# Altium PCB PCB.PcbDoc (part 2 of 2)
Units mil, origin at the board's own origin, x right, y up, seen from the top; angles counter-clockwise.
Board outline 3936.02 x 2558.06 mil, 4 copper layers (Top Layer 1, Top Layer, Bottom Layer, Bottom Layer 1), stack 58.4 mil thick; 158 components, 106 nets, 653 pads, 482 vias.
Unrouted connection lines stored in the file: 11.
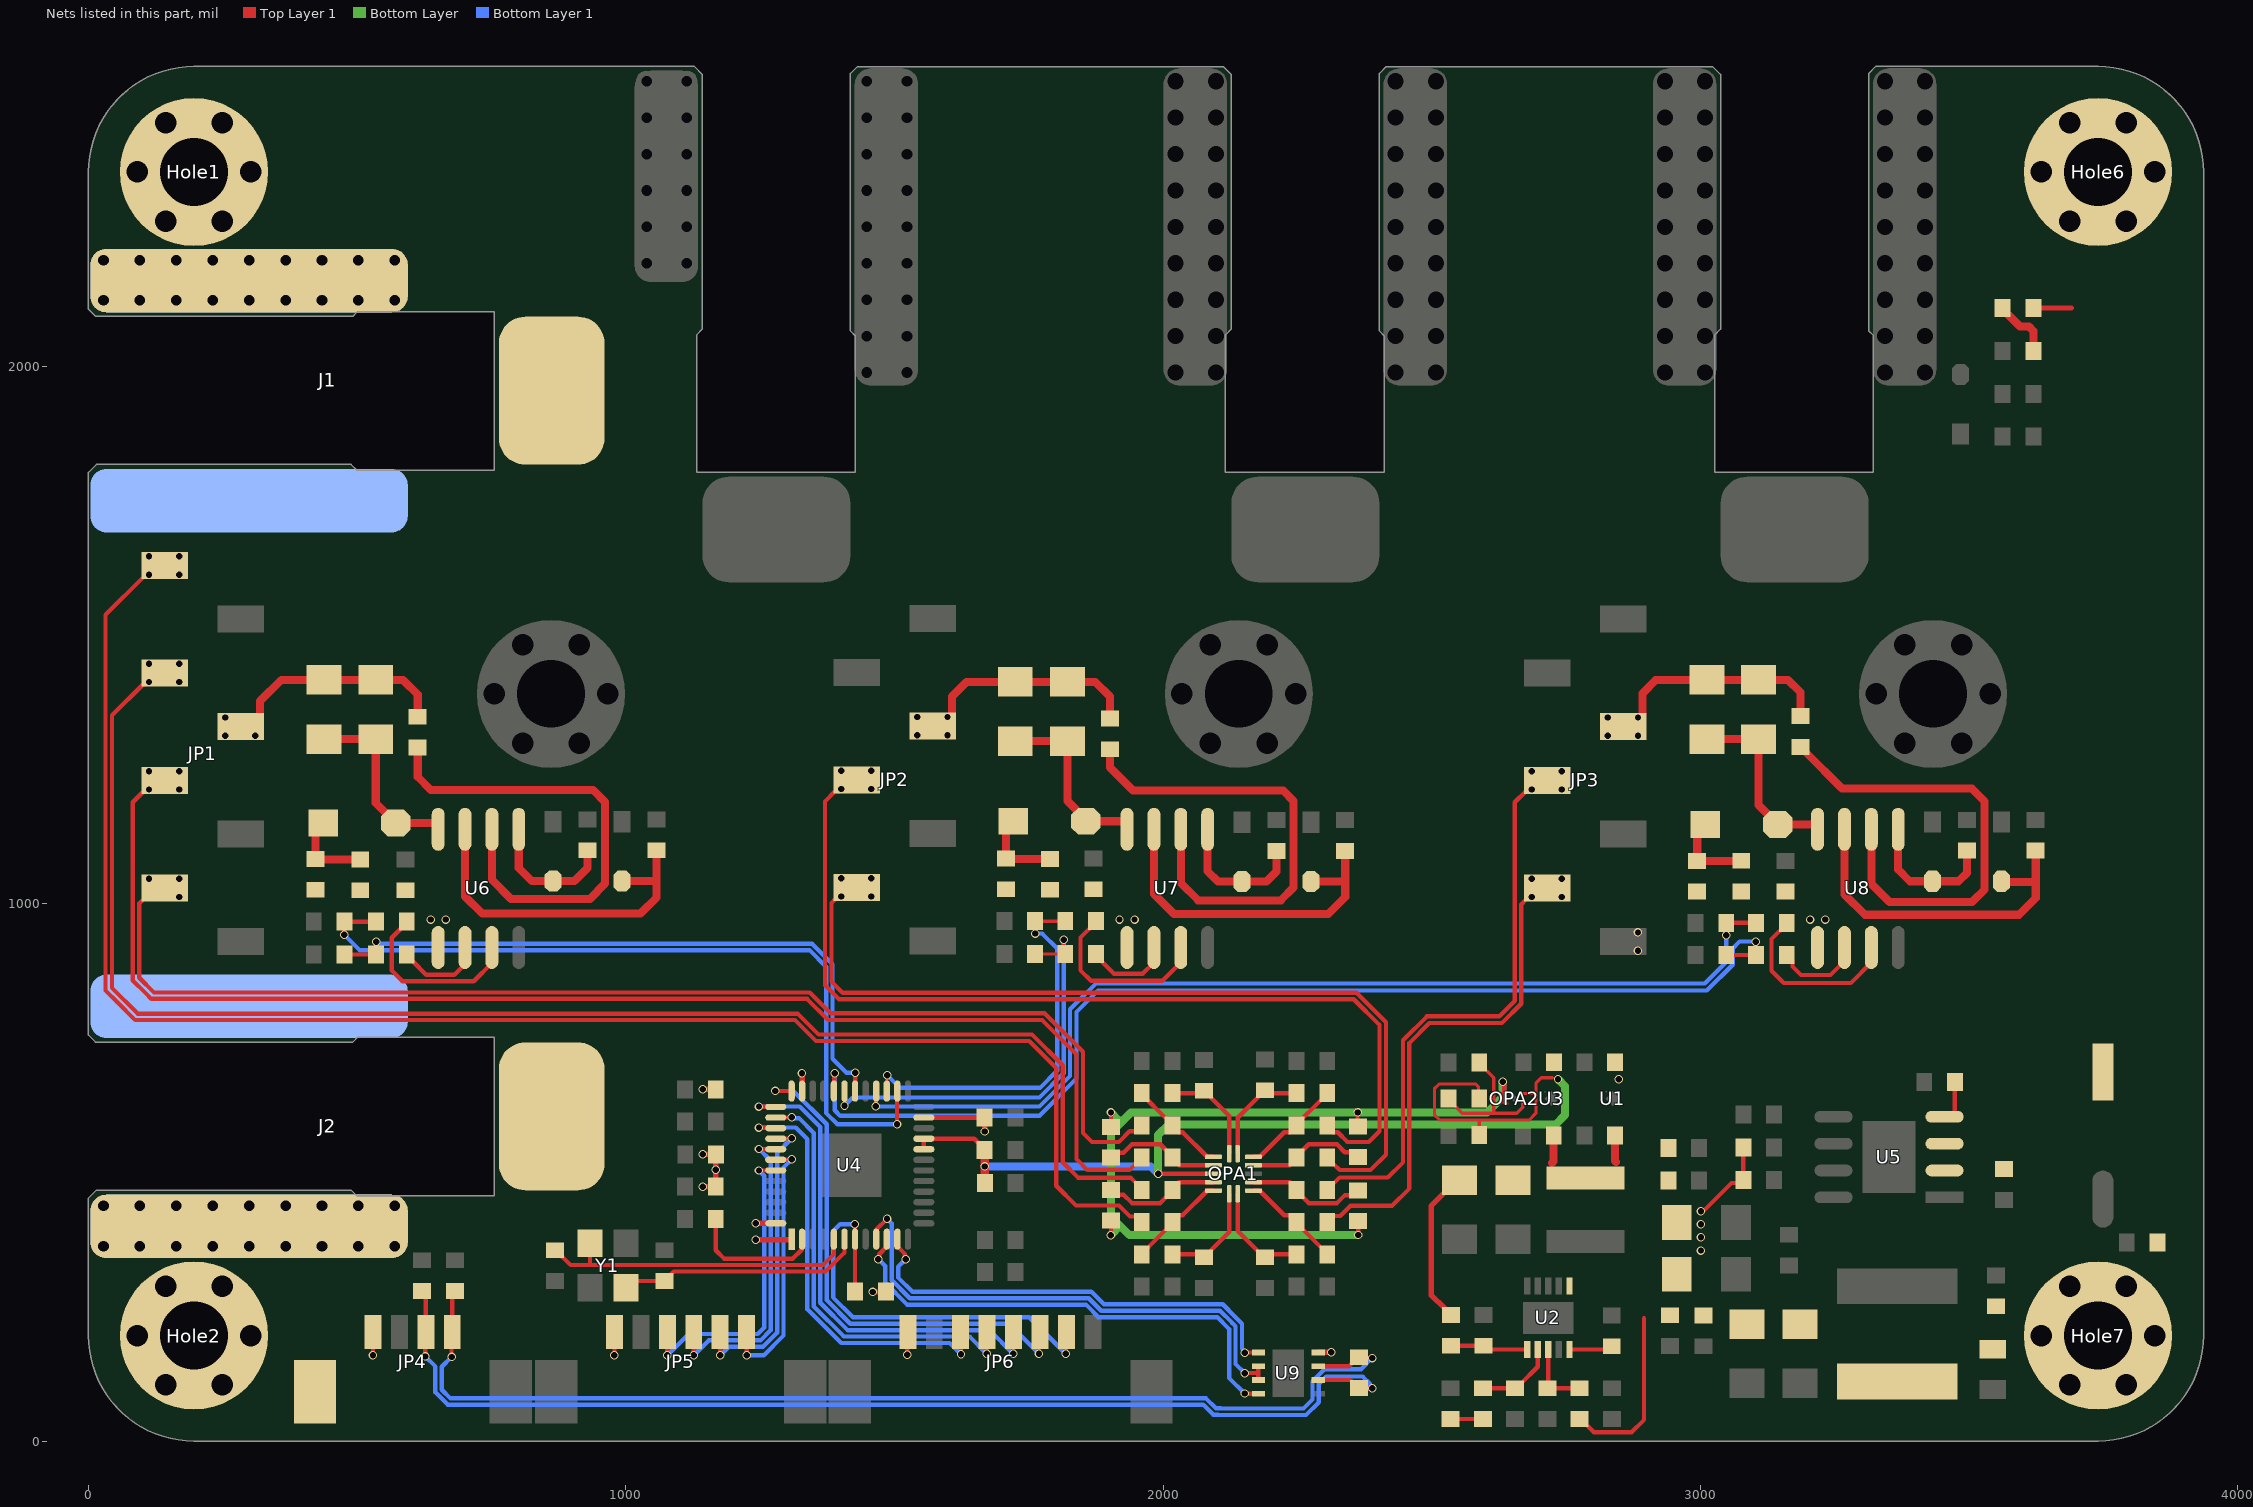
[diagram p4: the nets of this part, all layers, seen from the top]

## Via types
v1: diameter 15.75, hole 11.81, Top Layer 1 to Bottom Layer 1, tented both sides, 362 vias
v2: diameter 39.37, hole 28, Top Layer 1 to Bottom Layer 1, tented both sides, 120 vias

## Nets (pads, with @x,y where several pads share a name; then routed paths per layer and width w, separated by ;. In a path a pad name is that pad's centre, name@x,y a point inside that pad or via, vN(x,y) a via of type N, cw(c..) or ccw(c..) an arc to the next point about the centre after c; other vN are vias at no path point) (continued)
NetC20_2: C20.2 R9.1 U2.7 | length 144.2
  Top Layer 1 w8: R9.1@2595.13,98.75 C20.2@2655.13,98.75 C20.2@2657.09,98.75 ; C20.2@2665,102 2665,106.66 2697.32,138.97 U2.7@2697.32,170.83
NetC21_2: C21.2 R9.2 | length 60
  Top Layer 1 w8: C21.2@2535.13,41.67 R9.2@2595.13,41.67
NetC25_2: C25.2 C27.2 D1.2 U6.8 | length 355.8
  Top Layer 1 w15: C27.2@438.84,1306.88 529,1306.88 C25.2@534.84,1306.88 534.84,1187.7 D1.2@572,1150.54 646.84,1150.54 651,1146.39 U6.8@651,1139
NetC26_2: C26.2 C28.2 D2.2 U7.8 | length 349.4
  Top Layer 1 w15: C26.2@1725,1303 C28.2@1822,1303 1822,1191.32 1856.5,1156.82 D2.2@1856.5,1154 1928.84,1154 1933,1149.84 U7.8@1933,1139
NetC31_2: C31.2 C32.2 D7.2 U8.8 | length 350.7
  Top Layer 1 w15: C32.2@3012,1306.88 C31.2@3108,1306.88 3108,1184.23 3143.59,1148.65 D7.2@3143.59,1148 3213.93,1148 3218.09,1143.84 U8.8@3218.09,1139
NetD1_1: D1.1 R7.2 R15.2 | length 156.2
  Top Layer 1 w15: D1.1@437,1150.54 423,1136.54 R15.2@423,1083.54 423.5,1083.04 505.5,1083.04 R7.2@506,1082.54
NetD2_1: D2.1 R14.2 R16.2 | length 157.5
  Top Layer 1 w15: D2.1@1721.5,1154 1708,1140.5 R16.2@1708,1084.54 1708.5,1084.04 1789.5,1084.04 R14.2@1790,1083.54
NetD3_2: D3.2 R21.1 U6.7 | length 659.5
  Top Layer 1 w15: U6.7@701,1139 701,1014 733,982 1027.27,982 1057,1011.73 1057,1041 ; D3.2@993,1042.76 1055.24,1042.76 1057,1041 ; R21.1@1057,1099.91 1057,1041
NetD4_2: D4.2 R22.1 U7.7 | length 655.1
  Top Layer 1 w15: U7.7@1983,1139 1983,1018.73 2020.47,981.25 2307.46,981.25 2339,1012.79 2339,1042 ; D4.2@2275,1041.76 2338.76,1041.76 2339,1042 ; R22.1@2339,1098.91 2339,1042
NetD5_2: D5.2 R29.1 U6.5 | length 253
  Top Layer 1 w15: U6.5@801,1139 801,1067 825.24,1042.76 D5.2@865,1042.76 904.76,1042.76 929,1067 R29.1@929,1099.91
NetD6_2: D6.2 R30.1 U7.5 | length 260
  Top Layer 1 w15: U7.5@2083,1139 2083,1061 2102.12,1041.88 D6.2@2147,1041.88 2192.29,1041.88 2211,1060.59 R30.1@2211,1098.91
NetD7_1: D7.1 R31.2 R61.2 | length 156
  Top Layer 1 w15: D7.1@3008.59,1148 2994.09,1133.5 R31.2@2994.09,1080.09 2994.32,1080.32 3075.77,1080.32 R61.2@3076,1080.54
NetD8_2: D8.2 R34.1 U8.7 | length 658.4
  Top Layer 1 w15: U8.7@3268.09,1139 3268.09,1017.91 3306,980 3593,980 3624,1011 3624,1041 ; D8.2@3560,1042.2 3561.2,1041 3624,1041 ; R34.1@3624,1099.35 3624,1041
NetD9_2: D9.2 R38.1 U8.5 | length 259.9
  Top Layer 1 w15: U8.5@3368.09,1139 3368.09,1063.91 3389.68,1042.32 3480.51,1042.32 3496,1057.82 R38.1@3496,1099.35
NetOPA1_1: OPA1.1 R42.1 R43.1 | length 185.9
  Top Layer 1 w8: R43.1@1960.46,648 1960.46,646.03 2005.76,600.73 2006.78,600.73 2017.54,589.97 R42.1@2017.54,588 2017.54,586.03 2028.31,575.27 2036.41,575.27 2082.18,529.5 OPA1.1@2093.8,529.5
NetOPA1_2: OPA1.2 R39.1 R40.1 | length 219.5
  Top Layer 1 w8: R39.1@1903,528 1911.96,536.96 1926.51,536.96 1942.28,552.73 1994.78,552.73 2017.54,529.97 R40.1@2017.54,528 2017.54,526.03 2029.83,513.75 OPA1.2@2093.8,513.75
NetOPA1_4: OPA1.4 R44.1 R45.1 | length 219.5
  Top Layer 1 w8: R44.1@1903,468 1911.96,459.04 1926.51,459.04 1942.29,443.27 1994.78,443.27 2017.54,466.03 R45.1@2017.54,468 2017.54,469.97 2029.83,482.25 OPA1.4@2093.8,482.25
NetOPA1_5: OPA1.5 R47.1 R48.1 | length 185.9
  Top Layer 1 w8: R48.1@1960.46,348 1960.46,349.97 1971.22,360.73 1972.24,360.73 2017.54,406.03 R47.1@2017.54,408 2017.54,409.97 2028.31,420.73 2036.41,420.73 2082.18,466.5 OPA1.5@2093.8,466.5
NetOPA1_6: OPA1.6 R46.2 R48.2 | length 199.6
  Top Layer 1 w8: R48.2@2017.54,348 2072.51,348 2077.97,342.54 2088.73,353.31 2088.73,355.28 2123.13,389.67 OPA1.6@2123.13,460.8
NetOPA1_7: OPA1.7 R51.2 R53.2 | length 201.3
  Top Layer 1 w8: OPA1.7@2138.87,460.8 2138.87,391.7 2188.03,342.54 2193.49,348 R53.2@2248.46,348
NetOPA1_8: OPA1.8 R52.1 R53.1 | length 189.9
  Top Layer 1 w8: OPA1.8@2168.2,466.5 2179.82,466.5 2225.59,420.73 2237.69,420.73 2248.46,409.97 R52.1@2248.46,408 2248.46,406.03 2293.76,360.73 2294.78,360.73 2305.54,349.97 R53.1@2305.54,348
NetOPA1_9: OPA1.9 R49.1 R50.1 | length 223.1
  Top Layer 1 w8: OPA1.9@2168.2,482.25 2236.17,482.25 2248.46,469.97 R50.1@2248.46,468 2248.46,466.03 2271.22,443.27 2323.62,443.27 2338.5,458.15 2354.15,458.15 R49.1@2363,467
NetOPA1_11: OPA1.11 R54.1 R55.1 | length 223.1
  Top Layer 1 w8: OPA1.11@2168.2,513.75 2236.17,513.75 2248.46,526.03 2248.46,529.97 2271.22,552.73 2323.62,552.73 2338.22,538.14 2353.86,538.14 R54.1@2363,529
NetOPA1_12: OPA1.12 R57.1 R58.1 | length 189.9
  Top Layer 1 w8: OPA1.12@2168.2,529.5 2179.82,529.5 2225.59,575.27 2237.69,575.27 2248.46,586.03 R57.1@2248.46,588 2248.46,589.97 2293.76,635.27 2294.78,635.27 2305.54,646.03 R58.1@2305.54,648
NetOPA1_13: OPA1.13 R56.2 R58.2 | length 201.3
  Top Layer 1 w8: OPA1.13@2138.87,535.2 2138.87,602.33 2177.27,640.72 2177.27,642.69 2188.03,653.46 R56.2@2190,653.46 2195.46,648 R58.2@2248.46,648
NetOPA1_14: OPA1.14 R41.2 R43.2 | length 198.2
  Top Layer 1 w8: R43.2@2017.54,648 2071.54,648 R41.2@2076,652.46 2077.97,652.46 2088.73,641.69 2088.73,639.72 2123.13,605.33 OPA1.14@2123.13,535.2
NetOPA2_4: OPA2.4 R59.2 R60.1 | length 267.6
  Top Layer 1 w6: R59.2@2531.46,638 2531.46,636.03 2556.97,610.51 2607.69,610.51 2610.31,610.51 2615.23,610.51 ; R60.1@2588.54,705 2588.54,703.03 2615.23,676.35 2615.23,610.51 ; OPA2.4@2669.36,628.55 2669.35,621.46 2658.41,610.51 2615.23,610.51
NetR2_1: R2.1 U5.4 | length 80.5
  Top Layer 1 w8: U5.4@3454.35,604 3467.24,604 3473.54,610.31 R2.1@3473.54,669
NetR3_2: R3.2 R4.1 | length 113.7
  Top Layer 1 w15: R3.2@3562.46,2109 3562.46,2107.03 3594.74,2074.74 3611.21,2074.74 3620,2065.96 3620,2029.46 R4.1@3619.54,2029
NetR8_2: R8.2 R11.1 U2.8 | length 131
  Top Layer 1 w8: U2.8@2716.99,169 2716.99,100.62 R11.1@2715.13,98.75 R8.2@2775.13,98.75
NetR12_1: R12.1 U2.10 | length 81.2
  Top Layer 1 w8: U2.10@2756.36,170.83 2828.83,170.83 R12.1@2835,177
NetR19_2: R19.2 U6.2 | length 164.5
  Top Layer 1 w8: R19.2@592.54,906 592.54,904.03 603.31,893.27 603.59,893.27 628.75,868.11 681.11,868.11 701,888 U6.2@701,919
NetR20_2: R20.2 U7.2 | length 161.8
  Top Layer 1 w8: R20.2@1875.09,907 1885.85,896.24 1885.85,893.01 1908.86,870 1962,870 1983,891 U7.2@1983,919
NetR23_1: R23.1 U6.6 | length 906.2
  Top Layer 1 w15: R23.1@613,1291.46 613,1236.65 637.34,1212.31 939.51,1212.31 961.8,1190.01 961.8,1037.93 933.45,1009.58 786.42,1009.58 751,1045 U6.6@751,1139
NetR24_1: R24.1 U7.6 | length 895.8
  Top Layer 1 w15: R24.1@1901,1288 1901,1254 1944.12,1210.88 2223.63,1210.88 2243,1191.5 2243,1030.7 2219.12,1006.82 2065.42,1006.82 2033,1039.24 U7.6@2033,1139
NetR25_2: R25.2 U6.3 | length 340.3
  Top Layer 1 w8: R25.2@592.54,967 592.54,965.03 564.51,937 564.51,876.05 584.45,856.11 717.11,856.11 751,890 U6.3@751,919
NetR26_2: R26.2 U7.3 | length 340
  Top Layer 1 w8: R26.2@1875.09,968 1875.09,966.03 1846.54,937.49 1846.54,876.46 1866,857 1999,857 2033,891 U7.3@2033,919
NetR33_2: R33.2 U8.2 | length 164.7
  Top Layer 1 w8: R33.2@3160.63,905 3171.39,894.24 3171.39,883.61 3187,868 3242,868 3268.09,894.09 U8.2@3268.09,919
NetR35_1: R35.1 U8.6 | length 886.8
  Top Layer 1 w15: R35.1@3186,1292.46 3187.97,1292.46 3195.23,1285.19 3195.23,1283.22 3263.46,1215 3505,1215 3529,1191 3529,1027 3505.39,1003.39 3351.61,1003.39 3318.09,1036.91 U8.6@3318.09,1139
NetR36_2: R36.2 U8.3 | length 311.4
  Top Layer 1 w8: R36.2@3160.63,965 3160.63,963.03 3132.4,934.8 3132.4,875.6 3155,853 3280,853 3317,890 U8.3@3318,890
NRST: JP6.7 R64.2 U4.7 | length 811.5
  Top Layer 1 w8: v1(1426.24,404.18) 1426.54,403.87 1426.54,376.51 U4.7@1426.84,376.2 1426.84,282.16 R64.2@1429,280 ; v1(1819,163) 1819,202.09 JP6.7@1820.28,203.37
  Bottom Layer 1 w8: v1(1426.24,404.18) 1399.18,404.18 1386,391 1386,267.91 1422.91,231 1751,231 v1(1819,163)
PGND: Hole2.1 J2.1 JP4.0@421.64,92.72
RS485_A: C40.2 JP4.3 R62.1 U9.6 | length 2125.1
  Top Layer 1 w8: C40.2@621,280 628.06,272.94 JP4.3@628.06,203.37 627,202.31 v1(627,158) ; U9.6@2288.61,114.2 2348.29,114.2 R62.1@2362,100.49 ; R62.1@2365,99.46 2365.46,99 v1(2389,99)
  Bottom Layer 1 w8: v1(627,158) 627,157.89 645.85,139.05 645.85,91.19 669.04,68 2075.03,68 2093.37,49.66 2102.34,49.66 2102.98,49.02 2266.15,49.02 2289.97,72.84 2289.97,107.02 2303.74,120.8 2371.36,120.8 2385.13,107.03 2385.13,104.97 2389,101.1 v1(2389,99)
RS485_B: C39.1 JP4.4 R62.2 U9.7 | length 2103.6
  Top Layer 1 w8: v1(676,157) 676,202.09 JP4.4@677.28,203.37 677.28,275.28 C39.1@682,280 ; U9.7@2288.61,139.8 2346.29,139.8 2358.49,152 R62.2@2364,152 ; R62.2@2365,156.54 2366.54,155 v1(2389,155)
  Bottom Layer 1 w8: v1(676,157) 676,156.89 657.85,138.74 657.85,96.16 674.01,80 2080,80 2098.34,61.66 2107.31,61.66 2107.95,61.02 2261.18,61.02 2277.97,77.81 2277.97,111.99 2300.2,134.23 2368.23,134.23 v1(2389,155)
Shunt_BusH: JP1.6 R45.2 | length 2780.5
  Top Layer 1 w8: v1(112.88,1413) 108.88,1409 102.03,1409 44.1,1351.06 44.1,843.9 92,796 1320,796 1359.01,756.99 1756.01,756.99 1813.25,699.75 1813.25,519.4 1841.89,490.76 1939.66,490.76 1960.46,469.97 R45.2@1960.46,468
  other v1: 169,1413 112.88,1447 168.99,1447
Shunt_BusL: JP1.8 R47.2 | length 3082.4
  Top Layer 1 w8: JP1.8@142,1630 124,1630 109.94,1615.94 109.64,1615.94 102.69,1609 102.69,1608.69 32.1,1538.1 32.1,838.93 54.03,817 87.03,784 1315.03,784 1354.04,744.99 1751.04,744.99 1801.25,694.78 1801.25,684.78 ; 1801.25,684.66 1801.25,475.67 1838.03,438.9 1918.06,438.9 1938.47,418.48 1949.97,418.48 R47.2@1960.46,408
  other v1: 112.88,1613 169,1613 112.88,1647 168.99,1647
Shunt_UH: JP1.4 R40.2 | length 2520.2
  Top Layer 1 w8: v1(112.88,1213) 108.88,1209 102.33,1209 82.6,1189.27 82.6,857.86 107.14,833.32 117.05,823.4 1337.63,823.4 1377.03,784 1775,784 1839,720 1839,525.16 1858.92,505.24 1937.69,505.24 1947.72,515.27 1949.69,515.27 1960.46,526.03 R40.2@1960.46,528
  other v1: 169,1213 112.88,1247 168.99,1247
Shunt_UL: JP1.2 R42.2 | length 2293.6
  Top Layer 1 w8: JP1.2@142,1030 123.69,1030 94.6,1000.9 94.6,862.83 122.02,835.4 1342.6,835.4 1381.39,796.61 1779.36,796.61 1851,724.97 1851,573.69 1867.69,557 1917.72,557 1937.75,577.02 1949.69,577.02 1960.46,587.79 R42.2@1960.46,589.97
  other v1: 169,1013 112.88,1047 168.99,1047
Shunt_VH: JP2.2 R55.2 | length 1611.1
  Top Layer 1 w8: v1(1400.88,1014) 1394.7,1014 1390.69,1010 1390.69,1009.86 1382.81,1001.98 1382.81,855.61 1403.66,834.77 2360,834.77 2414.7,780.04 2414.7,533.41 2386.08,504.8 2328.75,504.8 2318.28,515.27 2316.31,515.27 2305.54,526.03 R55.2@2305.54,528
  other v1: 1457,1014 1400.88,1048 1456.99,1048
Shunt_VL: JP2.4 R57.2 | length 1761.3
  Top Layer 1 w8: v1(1400.88,1214) 1396.88,1210 1390.08,1210 1370.81,1190.73 1370.81,848.82 1396.86,822.77 2355,822.77 2402.7,775.07 2402.7,577.14 2382.76,557.2 2343,557.2 2324.93,575.27 2316.31,575.27 2305.54,586.03 R57.2@2305.54,588
  other v1: 1457,1214 1400.88,1248 1456.99,1248
Shunt_WH: JP3.4 R50.2 | length 1039.6
  Top Layer 1 w8: R50.2@2305.54,468 2305.54,469.97 2316.31,480.73 2318.28,480.73 2328.54,491 2418.27,491 2446.38,519.12 2446.38,746.26 2490.93,790.8 2625.61,790.8 2654.44,819.64 2654.44,1189.24 2674.21,1209 2681.88,1209 v1(2685.88,1213)
  other v1: 2742,1213 2685.88,1247 2741.99,1247
Shunt_WL: JP3.2 R52.2 | length 898.5
  Top Layer 1 w8: R52.2@2305.54,408 2305.54,408.71 2316.31,419.47 2329.75,419.47 2348.81,438.53 2426.13,438.53 2458.38,470.78 2458.38,741.29 2495.47,778.38 2630.58,778.38 2666.44,814.24 2666.44,999.12 2675.69,1008.37 2675.69,1009 2679.7,1013 v1(2685.88,1013)
  other v1: 2742,1013 2685.88,1047 2741.99,1047
SPI3_CS: JP5.3 U4.43 | length 572.6
  Top Layer 1 w8: v1(1077.43,160.06) JP5.3@1077.43,203.37 JP5.3@1077.49,203.43 ; v1(1248,504) 1248.08,504.08 1279.13,504.08 U4.43@1279.2,504.16
  Bottom Layer 1 w8: v1(1077.43,160.06) 1117.27,199.9 1245.74,199.9 1257.78,211.94 1257.78,494.22 v1(1248,504)
SPI3_MISO: JP5.4 U4.41 | length 583.4
  Top Layer 1 w8: v1(1126.64,160.06) JP5.4@1126.64,203.37 JP5.4@1126.7,203.43 ; v1(1248,544) 1248.24,543.76 1278.97,543.76 U4.41@1279.2,543.53
  Bottom Layer 1 w8: v1(1126.64,160.06) 1154.48,187.91 1250.71,187.91 1269.78,206.97 1269.78,522.22 v1(1248,544)
SPI3_MOSI: JP5.6 U4.42 | length 492.1
  Top Layer 1 w8: v1(1225,160) 1225,203.31 JP5.6@1225.06,203.37 ; U4.42@1279.2,523.84 1279.78,524.42 1308.42,524.42 v1(1309,525)
  Bottom Layer 1 w8: v1(1225,160) 1256.75,160 1293.78,197.03 1293.78,509.78 v1(1309,525)
SPI3_SCK: JP5.5 U4.40 | length 570.1
  Top Layer 1 w8: v1(1175.85,160.06) JP5.5@1175.85,203.37 JP5.5@1175.85,203.37 ; U4.40@1279.2,563.21 1279.6,563.61 1308.61,563.61 v1(1309,564)
  Bottom Layer 1 w8: v1(1175.85,160.06) 1191.69,175.91 1255.68,175.91 1281.78,202 1281.78,536.78 v1(1309,564)
SumGND: C41.2 C42.2 Hole7.1 LB1.1
SWCLK: JP6.5 U4.37 | length 927.3
  Top Layer 1 w8: v1(1248,623) 1248.37,622.63 1278.84,622.63 U4.37@1279.2,622.27 ; v1(1721,163) 1721,202.52 JP6.5@1721.85,203.37
  Bottom Layer 1 w8: v1(1248,623) 1324,623 1362,585 1362,257.97 1412.97,207 1677,207 v1(1721,163)
SWDIO: JP6.6 U4.36 | length 957.2
  Top Layer 1 w8: v1(1278,652) 1308.53,652 U4.36@1308.73,651.8 ; v1(1769,163) 1769,201.31 JP6.6@1771.06,203.37
  Bottom Layer 1 w8: v1(1278,652) 1311.97,652 1374,589.97 1374,262.94 1417.94,219 1713,219 v1(1769,163)
TIM1_BKIN: R65.2 U4.2 | length 251.8
  Top Layer 1 w8: R65.2@1167.54,414 1167.54,355.46 1183,340 1311,340 1327.69,356.69 1327.69,375.48 U4.2@1328.42,376.2
TIM1_CH1: R17.1 R19.1 U4.30 | length 1212.6
  Top Layer 1 w8: R17.1@476.54,906 R19.1@535.46,906 536,906.54 v1(536,930) ; U4.30@1426.84,651.8 1426.92,651.87 1426.92,685.92 v1(1427,686)
  Bottom Layer 1 w8: v1(536,930) 538.1,930 542,926.09 1346.91,926.09 1385,888 1385,712 1411,686 v1(1427,686)
TIM1_CH1N: R25.1 R27.2 U4.26 | length 1479.6
  Top Layer 1 w8: v1(476,943) 476,966.46 R27.2@476.54,967 R25.1@535.46,967 ; v1(1505,590.09) 1505,651.21 U4.26@1505.58,651.8
  Bottom Layer 1 w8: v1(476,943) 504.91,914.09 1341.94,914.09 1373,883.03 1373,611 1393.91,590.09 v1(1505,590.09)
TIM1_CH2: R18.1 R20.1 U4.31 | length 792
  Top Layer 1 w6: v1(1407.16,624.68) U4.31@1407.16,651.8 ; R18.1@1762,907 R20.1@1818,907 1815,910 v1(1815,933.39)
  Bottom Layer 1 w8: v1(1407.16,624.68) 1422.48,640 1770,640 1815,685 v1(1815,933.39)
TIM1_CH2N: R26.1 R28.2 U4.27 | length 727.2
  Top Layer 1 w6: U4.27@1485.9,651.8 1486.45,652.35 1486.45,680.45 v1(1487,681) ; v1(1762,945) R28.2@1762,968 R26.1@1818,968
  Bottom Layer 1 w8: v1(1487,681) 1510.2,657.8 1770.83,657.8 1803,689.97 1803,917 1775,945 v1(1762,945)
TIM1_CH3: R32.1 R33.1 U4.32 | length 2126
  Top Layer 1 w8: U4.32@1387.47,651.8 1388.2,652.52 1388.2,684.2 v1(1389,685) ; R32.1@3048.09,905 R33.1@3103.54,905 3103,905.54 v1(3103,930)
  Bottom Layer 1 w8: v1(1389,685) 1389,616 1399,606 1769.94,606 1839,675.06 1839,799.03 1878.96,838.99 3011.96,838.99 3060,887.03 3060,917 3073,930 v1(3103,930)
TIM1_CH3N: R36.1 R37.2 U4.28 | length 1924.2
  Top Layer 1 w8: v1(1465.19,623.27) 1465.7,623.79 1465.7,651.28 U4.28@1466.21,651.8 ; v1(3048,942) 3048,964.91 R37.2@3048.09,965 R36.1@3103.54,965
  Bottom Layer 1 w8: v1(1465.19,623.27) 1770.24,623.27 1827,680.03 1827,804 1875,852 3008,852 3048,892 v1(3048,942)
UART4_RX: JP6.3 U4.39 | length 809.4
  Top Layer 1 w8: v1(1248,584) 1248.55,583.45 1278.65,583.45 U4.39@1279.2,582.9 ; JP6.3@1623.43,203.37 1624,202.8 v1(1624,162)
  Bottom Layer 1 w8: v1(1248,584) 1316.37,584 1338,562.37 1338,246 1401,183 1603,183 v1(1624,162)
UART4_TX: JP6.4 U4.38 | length 805.1
  Top Layer 1 w8: U4.38@1279.2,602.58 1279.41,602.79 1308.79,602.79 v1(1309,603) ; v1(1672,163) 1672,202.73 JP6.4@1672.64,203.37
  Bottom Layer 1 w8: v1(1309,603) 1310.48,601.52 1322.45,601.52 1350,573.97 1350,250.97 1405.97,195 1640,195 v1(1672,163)
USART2_DE: U4.9 U9.2 U9.3 | length 985.9
  Top Layer 1 w8: U4.9@1466.21,376.2 1466.94,376.93 1466.94,394.56 v1(1486.32,413.94) ; v1(2152,127) 2176.39,127 2177.39,128 ; U9.3@2175,115 2176.68,115 2177.39,115.71 2177.39,128 ; U9.2@2177.39,139.8 2177.39,128
  Bottom Layer 1 w8: v1(1486.32,413.94) 1495,405.27 1495,299.97 1528.61,266.36 1861.64,266.36 1885,243 2106.03,243 2129.03,220 2135,214.03 2135,144 v1(2152,127)
USART2_RX: U4.11 U9.1 | length 840.7
  Top Layer 1 w8: U4.11@1505.58,376.2 1505.58,362.43 1519.52,348.49 1519.52,340.48 v1(1521,339) ; v1(2152,165) 2152.19,165.19 2177.2,165.19 U9.1@2177.39,165.38
  Bottom Layer 1 w8: v1(1521,339) 1507,325 1507,304.94 1533.58,278.36 1866.61,278.36 1889.97,255 2111,255 2134,232 2147,219 2147,172.1 2152,167.1 v1(2152,165)
USART2_TX: U4.10 U9.4 | length 926.2
  Top Layer 1 w8: v1(1470.21,338.98) 1471.69,340.47 1471.69,348.22 1485.9,362.43 U4.10@1485.9,376.2 ; v1(2152,89) 2152.19,88.81 2177.2,88.81 U9.4@2177.39,88.62
  Bottom Layer 1 w8: v1(1470.21,338.98) 1483,326.2 1483,295 1523.64,254.36 1856.67,254.36 1880.03,231 2101.06,231 2123,209.06 2123,118 v1(2152,89)
VBUS: C2.2 E1.1 Hole1.1 Hole6.1 J1.1 R3.1 U5.2 U5.3 | length 70.5
  Top Layer 1 w10: R3.1@3619.54,2109 3690,2109
VCC3.3V: C8.1 C43.2 C44.2 C45.2 C46.2 JP4.1 JP5.1 JP6.1 R64.1 U1.1 U4.1 U4.23 U4.35 U4.48 U9.8 | length 602.7
  Top Layer 1 w8: v1(529.64,160.06) JP4.1@529.64,203.37 JP4.1@529.7,203.43 ; v1(979,160.06) JP5.1@979,203.37 JP5.1@979.06,203.43 ; v1(1524,161) 1524,202.37 JP6.1@1525,203.37
  Top Layer 1 w10: v1(1143.09,474) C44.2@1167.54,474 ; v1(1143.09,655) C45.2@1167.54,655 ; v1(1143.55,534) C43.2@1168,534 1167.5,533.5 v1(1167.5,505.5) C44.2@1167.54,474 ; v1(1241.87,375) 1307.83,375 1308.73,375.91 U4.1@1308.73,376.2 ; v1(1241.87,406) 1242,405.87 1279.07,405.87 U4.48@1279.2,405.73 ; v1(1328,685) 1328.21,684.79 1328.21,652 U4.35@1328.42,651.8 ; v1(1459.64,278) 1483.09,278 R64.1@1484.09,279 ; U4.23@1554.8,602.58 1667.58,602.58 C46.2@1668,603 v1(1668,576.61) ; U9.8@2288.61,165.38 2288.92,165.69 v1(2312.69,165.69) ; C8.1@2841.09,705.47 C8.1@2849.8,696.76
  other v1: 2848,674
VCC5V: C9.2 C15.2 C16.2 C17.2 C18.2 C22.2 L2.2 R10.1 U1.3 U1.4 U3.3 U3.4 | length 389.3
  Top Layer 1 w10: R10.1@2536,235.09 2534.03,235.09 2524.27,244.85 2524.27,246.82 2499,272.09 2499,437.92 2547.08,486 C16.2@2552,486 ; C22.2@2727.09,569.47 C22.2@2736,560.56
  Top Layer 1 w15: 2724,518 2727,521 2727,551 ; C9.2@2841.09,569.47 2841.09,521.91 2843,520
VCC12V: C3.2 C4.2 C5.2 C6.2 C7.2 C11.2 C12.2 C29.2 C30.2 C33.2 L1.2 R1.1 R7.1 R8.1 R14.1 R15.1 R16.1 R31.1 R61.1 U2.1 U6.1 U7.1 U8.1 | length 492.6
  Top Layer 1 w8: R8.1@2775.13,41.67 2777.09,41.67 2801.76,17 2872,17 2895,40 2895,229 ; v1(3001,428) 3002.48,429.48 3006.64,429.48 3057.84,480.68 3074.6,480.68 C7.2@3079.91,486 3079.91,506.24 R1.1@3079.91,547
  other v1: 3001,355 3001,380 3001,404 2883.74,913 2883.73,947 636.91,971 664.91,971 1918.91,971 1946.91,971 3204,971 3232,971
VCCA1.65V: OPA2.1 OPA2.2 R39.2 R44.2 R49.2 R54.2 | length 1610.5
  Top Layer 1 w8: v1(1902.98,383.8) R44.2@1903,410.91 ; R39.2@1903,585.09 v1(1903,612) ; v1(2362,612) 2362,587.09 R54.2@2363,586.09 ; v1(2363,384) R49.2@2363,409.91 ; v1@2632,666.9 v1@2632,667.95 ; v1(2632,669) v1@2632,667.95 ; OPA2.2@2638.65,628.55 2635.06,632.13 2635.06,664.89 v1@2632,667.95
  Bottom Layer w15: v1(1903,612) 1917.5,597.5 ; v1@1903.32,383.81 1919.93,401.07 ; v1(2363,384) 2362.86,383.86 2360.65,383.86 2360.6,383.8 1937.2,383.8 1919.93,401.07 ; v1(2632,669) 2631.86,668.86 2631.86,640.66 2603.2,612 v1(2362,612) 1940.35,612 1903,574.65 1903,418 1919.93,401.07
VCCA3.3V: C19.1 C38.2 C47.2 C48.2 OPA1.3 OPA2.5 R59.1 U3.1 U4.20 U4.21 | length 2050.7
  Top Layer 1 w6: C38.2@2588.54,570 2588.54,598 ; R59.1@2588.54,638 2586.78,639.76 2586.78,660.22 2582,665 2514,665 2505,656 2505,608 2514.95,598.05 2681.65,598.05 2693.79,610.19 2693.79,647.45 ; OPA2.5@2669.35,647.45 2693.79,647.45 ; 2724.93,676.49 2704.15,676.49 2693.79,666.12 2693.79,647.45
  Top Layer 1 w8: U4.20@1554.8,543.53 U4.20@1554.8,546 ; U4.20@1555,546 1554.8,546.2 U4.21@1554.8,563.21 1648.76,563.21 C48.2@1662.97,549 ; C47.2@1663,476 C47.2@1668,481 ; v1(1990.77,498) OPA1.3@2093.8,498
  Top Layer 1 w15: C48.2@1668,542 1668.23,541.77 1668.23,481.23 C47.2@1668.46,481
  Bottom Layer w15: v1(1990.77,498) 1990.77,569.77 2011,590 2731,590 2748.24,607.24 2748.24,660.76 v1(2735,674)
  Bottom Layer 1 w15: v1(1668,511.5) 1977.07,511.5 1990.57,498 v1(1990.77,498)
VS_U: C25.1 C27.1 JP1.5 R23.2 | length 435.6
  Top Layer 1 w15: JP1.5@283.74,1330 302.05,1330 319.55,1347.5 319.55,1377.55 359.12,1417.12 C27.1@438.84,1417.12 C25.1@534.84,1417.12 585.88,1417.12 613,1390 R23.2@613,1348.54
  other v1: 254.62,1313 310.74,1313 254.62,1347
VS_V: C26.1 C28.1 JP2.5 R24.2 | length 437.5
  Top Layer 1 w15: JP2.5@1571.74,1331 1588.6,1347.86 1598.38,1347.86 1598.48,1347.96 JP2.5@1598.48,1348.24 ; v1(1598.73,1348) 1606.5,1348 1607,1348.5 1607,1386 1634.24,1413.24 C26.1@1725,1413.24 C28.1@1822,1413.24 1873.76,1413.24 1901,1386 R24.2@1901,1345.09
  other v1: 1542.62,1314 1598.74,1314 1542.62,1348
VS_W: C31.1 C32.1 JP3.5 R35.2 | length 402.6
  Top Layer 1 w15: JP3.5@2883.13,1338.08 JP3.5@2887.89,1342.84 ; JP3.5@2887.39,1347 JP3.5@2887.89,1347.5 ; 2892,1355.27 2892,1392 2916.81,1416.81 3011.69,1416.81 C32.1@3012,1417.12 3162.88,1417.12 3186,1394 R35.2@3186,1349.54
  other v1: 2827.62,1313 2883.74,1313 2827.62,1347 2883.73,1347
VSENSE-A: R10.2 R13.1 U2.6 | length 144.6
  Top Layer 1 w8: R10.2@2536,178 R13.1@2596,178 2603.17,170.83 U2.6@2677.62,170.83
XIN: C24.1 U4.5 Y1.3 | length 607.4
  Top Layer 1 w8: C24.1@868,355.54 869.97,355.54 897.51,328 933.54,328 ; Y1.3@933.54,368.34 933.54,328 ; U4.5@1387.47,376.2 1387.47,348.47 1367,328 933.54,328
XOUT: C23.1 U4.6 Y1.1 | length 460
  Top Layer 1 w8: Y1.1@1000.46,285.66 1013.26,298.46 1073.97,298.46 1084.73,309.22 1084.73,311.19 1089.54,316 1371.97,316 1407.16,351.19 U4.6@1407.16,376.2
pads on no net: JP1.1 JP2.1 JP2.6 JP3.1 JP3.6 JP6.8 U4.3 U4.4 U4.12 U4.19 U4.22 U4.24 U4.25 U4.29 U4.33 U4.34 U4.44 U4.45 U4.47 U5.6 U5.10 U5.11
copper on no net: | length 40.6
  Top Layer 1 w8: 1869.49,203.37 1870,202.86 v1(1870,163)
  other v1: 254.62,913 310.74,913 2827.62,913 1542.62,914 1598.74,914 254.62,947 310.73,947 2827.62,947 1542.62,948 1598.73,948 2685.88,1413 2742,1413 1400.88,1414 1457,1414 2685.88,1447 2741.99,1447 1400.88,1448 1456.99,1448

## Polygon pours and split planes (outlines as drawn)
GND on Top Layer "NONET_L02_P009" (solid, remove dead copper, pour order 9): 623,354 623,424 648,449 935.14,449 978,491.86 978,725 934,769 370,769 331,808 331,1137 375,1181 1334,1181 1382,1133 1382,865 1411,836 1587,836 1618,867 1618,1139 1660,1181 2636,1181 2668,1149 2668,872 2704,836 2870,836 2904,870 2904,1155 2930,1181 3897,1181 3921.24,1156.76 3921.24,376.24 3890,345 3664,345 3589,270 3589,132 3638,83 3638,38 3615.53,15.53 534.47,15.53 501,49 501,232
AGND on Top Layer "NONET_L02_P004" (solid, remove dead copper, pour order 4): 1714,536 1714,291 1745,260 2482,260 2502,280 2502,336 2526,360 2565,360 2586,381 2586,701 2551,736 1913,736 1884,707 1795,707 1747,659 1747,569
VCC3.3V on Bottom Layer "NONET_L03_P005" (solid, remove dead copper, pour order 5): 2877,746 2901,722 2901,59 2843,1 531,1 498,34 498,233 574,309 624,359 624,414 650,440 948,440 987,479 987,713 1020,746
VCC12V on Bottom Layer "NONET_L03_P001" (solid, remove dead copper, pour order 1): 625,979 614,968 614,768 628,754 2882,754 2909,727 2909,366 2929,346 3226,346 3245,365 3245,969 3235,979 2855,979 2843,967 2843,880 2817,854 2693,854 2009,854 1998,865 1998,968 1987,979 1912,979 1902,969 1902,867 1889,854 728,854 717,865 717,965 703,979

## Other copper
Top Layer 1:
  region net Motor-U: 1388,1797 1417.33,1767.67 1417.33,1626.33 1351,1560 1351,1326 1278,1253 804,1253 723,1334 723,1698 822,1797
  region net VCCA3.3V: 2743,641.28 2743,660.16 2743,723 2741,725 2713,725 2711,723 2711,673.28
  region net VCC3.3V: 2825,725 2823,723 2823,685 2829.53,678.47 2843.42,664.58 2843.42,658.67 2843.42,654.73 2856,642.15 2856,722 2853,725
  region net VCC5V: 2820.74,631.11 2834.85,617 2839.16,617 2853.26,631.11 2855.23,631.11 2855.23,588.77 2857,587 2857,552 2856,551 2828,551 2825,554 2825,593 2818.78,599.22 2818.78,631.11
  region net VCC5V: 2705,631 2705,591 2711,585 2711,553 2713,551 2741,551 2745,555 2745,616 2741.44,619.56 2741.44,631 2739.43,631 2725.43,617 2720.98,617 2706.98,631
  region net NetC10_1: 2731.19,273 2742.26,273 2743.33,274.07 2743.33,308.81 2750.52,316 2855,316 2866,327 2866,400 2859,407 2703,407 2698,402 2698,327 2709,316 2723,316 2729.11,309.89 2729.11,275.09
  region net PGND: 21,459 4,442 4,189 134,59 438,59 481,102 481,241 594.54,354.54 594.54,441.94 577.48,459
  region net Motor-V: 2003,1281 2031,1253 2395,1253 2417,1275 2417,1753 2374,1796 2043,1796 2003,1756
  region net Motor-W: 3067,1796 3037.75,1766.75 3037.75,1627.25 3066,1599 3225,1599 3295,1529 3295,1297 3339,1253 3578,1253 3617,1292 3617,1745 3566,1796
  region net GND: 3056.91,139.03 3047,129.12 3047,58.12 3055.99,49.13 3216.01,49.13 3226.05,59.17 3226.05,134.07 3221.09,139.03
  region net GND: 2521.91,406.91 2512,397 2512,326 2520.99,317.01 2681.01,317.01 2691.05,327.05 2691.05,401.95 2686.09,406.91
  region net NetC1_1: 3203.36,451.36 3203.36,289.7 3241.06,252 3478,252 3490,264 3490,410 3479,421 3307,421 3285,443 3285,457 3274,468 3220,468
  region net GND: 3042,445 3035,438 3035,280 3045,270 3125,270 3135,280 3135,436 3126,445
  region net GND: 3516,295 3526,285 3616,285 3679,348 3803.66,348 3817,361.34 3817,387 3809,395 3530,395 3516,381
  region net GND: 3519,120 3512,113 3512,46 3524,34 3631,34 3643,46 3643,56 3579,120
  region net VCC12V: 3490,75 3478,63 3256,63 3236,83 3236,135 3197,174 3052,174 3024,202 2903,202 2890,215 2890,255 2877,268 2756,268 2750,274 2750,304 2754,308 2881,308 2892,319 2892,433 2901,442 3012,442 3024,430 3024,278 3039,263 3208,263 3232,239 3481,239 3490,230
  region net SumGND: 3531,271 3516,256 3516,139 3527,128 3581,128 3651,58 3797.68,58 3886,146.32 3886,386 3877,395 3830,395 3823,388 3823,358 3801,336 3683,336 3618,271
  region net VBUS: 137.78,2500 4,2366.22 4,2118 21.43,2100.57 576.57,2100.57 594.72,2118.72 594.72,2477.28 572,2500
  region net VCC12V: 2975.09,1048 2968.09,1041 2968.09,998 2975.09,991 3180.09,991 3192.09,979 3192.09,886 3198.09,880 3238.09,880 3244.09,886 3244.09,1030 3235.09,1039 3120.09,1039 3111.09,1048
  region net VCC12V: 1690,1048 1683,1041 1683,998 1690,991 1895,991 1907,979 1907,886 1913,880 1953,880 1959,886 1959,1030 1947,1042 1832,1042 1826,1048
  region net VCC12V: 408,1048 401,1041 401,998 408,991 613,991 625,979 625,886 631,880 671,880 677,886 677,1030 666,1041 551,1041 544,1048
  region net VCC5V: 2512,438 2521,429 2867,429 2894,456 2951,456 2965,470 2965,559 2955,569 2883,569 2853,539 2522,539 2512,529
  region net VBUS: 3665,2510 3587,2432 3587,2225 3678,2134 3678,642 3611,575 3426,575 3418,567 3418,494 3425,487 3670,487 3709,526 3888,526 3917,555 3917,2427 3834,2510
Top Layer:
  region net PGND: 21,459 4,442 4,189 134,59 438,59 481,102 481,241 594.54,354.54 594.54,441.94 577.48,459
  region net VBUS: 138.03,2500 4.25,2366.22 4.25,2118 21.68,2100.57 576.82,2100.57 594.97,2118.71 594.97,2477.28 572.25,2500
  region net Motor-W: 3067,1796 3037.75,1766.75 3037.75,1627.25 3066,1599 3225,1599 3295,1529 3295,1297 3339,1253 3578,1253 3617,1292 3617,1745 3566,1796
  region net Motor-V: 2003,1281 2031,1253 2395,1253 2417,1275 2417,1753 2374,1796 2043,1796 2003,1756
  region net Motor-U: 1388,1797 1417.33,1767.67 1417.33,1626.33 1351,1560 1351,1326 1278,1253 804,1253 723,1334 723,1698 822,1797
Bottom Layer:
  region net PGND: 21,459 4,442 4,189 134,59 438,59 481,102 481,241 594.54,354.54 594.54,441.94 577.48,459
  region net VBUS: 138.03,2500 4.25,2366.22 4.25,2118 21.68,2100.57 576.82,2100.57 594.97,2118.71 594.97,2477.28 572.25,2500
  region net Motor-W: 3067,1796 3037.75,1766.75 3037.75,1627.25 3066,1599 3225,1599 3295,1529 3295,1297 3339,1253 3578,1253 3617,1292 3617,1745 3566,1796
  region net Motor-V: 2003,1281 2031,1253 2395,1253 2417,1275 2417,1753 2374,1796 2043,1796 2003,1756
  region net Motor-U: 1388,1797 1417.33,1767.67 1417.33,1626.33 1351,1560 1351,1326 1278,1253 804,1253 723,1334 723,1698 822,1797
Bottom Layer 1:
  region net PGND: 21,459 4,442 4,189 134,59 438,59 481,102 481,241 594.54,354.54 594.54,441.94 577.48,459
  region net VBUS: 137.78,2500 4,2366.22 4,2118 21.43,2100.57 576.57,2100.57 594.72,2118.72 594.72,2477.28 572,2500
  region net Motor-W: 3067,1796 3037.75,1766.75 3037.75,1627.25 3066,1599 3225,1599 3295,1529 3295,1297 3339,1253 3578,1253 3617,1292 3617,1745 3566,1796
  region net Motor-V: 2003,1281 2031,1253 2395,1253 2417,1275 2417,1753 2374,1796 2043,1796 2003,1756
  region net Motor-U: 1388,1797 1417.33,1767.67 1417.33,1626.33 1351,1560 1351,1326 1278,1253 804,1253 723,1334 723,1698 822,1797

## Silkscreen, mask and mechanical layers (free items; w line width, h text height)
Top Overlay:
  text "U" at 843.37,2321.37 h196.85
  text "V" at 1827.65,2321.37 h196.85
  text "VBUS" at 1055.19,1839.36 h62.99 r90
  text "misaka10039" at 2793.19,1723.81 h62.99 r90
  text "W" at 2846.37,1721.37 h196.85
  text "Ver0.2" at 2518.19,1605.81 h62.99 r90
  text "ControllerBoard" at 2610.19,1604.81 h62.99 r90
  text "2025/11/3" at 2708.19,1602.81 h62.99 r90
  text "PGND" at 1055.19,488.81 h62.99 r90
  text "UART4_RX" at 1793.81,249.74 h31.5 r90
  text "UART4_TX" at 1845.81,249.74 h31.5 r90
  text "CSn" at 1246.09,247.91 h31.5 r90
  text "VCC" at 1141.05,246.74 h31.5 r90
  text "GND" at 1193.05,246.74 h31.5 r90
  text "VCC" at 1566.05,246.74 h31.5 r90
  text "GND" at 1618.05,246.74 h31.5 r90
  text "VCC" at 518.09,244.91 h31.5 r90
  text "GND" at 570.09,244.91 h31.5 r90
  text "RS485_B" at 817.85,194.91 h31.5 r90
  text "MISO" at 1301.09,194.91 h31.5 r90
  text "MOSI" at 1388.09,194.91 h31.5 r90
  text "RS485_A" at 760.85,193.91 h31.5 r90
  text "SCK" at 1345.09,193.91 h31.5 r90
  text "DIO" at 2085.09,166.91 h31.5 r90
  text "CLK" at 2043.09,161.91 h31.5 r90
  text "NRST" at 2127.09,132.91 h31.5 r90
Top Solder:
  lines w40: 748.03,1574.8 944.88,1771.65 ; 748.03,1653.54 866.14,1771.65 ; 826.77,1574.8 1023.62,1771.65 ; 905.51,1574.8 1102.36,1771.65 ; 984.25,1574.8 1102.36,1692.91 ; 1023.62,1299.21 1299.21,1574.8 ; 1023.62,1456.69 1141.73,1574.8 ; 1062.99,1417.32 1220.47,1574.8 ; 1062.99,1574.8 1102.36,1614.17 ; 1102.36,1299.21 1338.58,1535.43 ; 1181.1,1299.21 1338.58,1456.69 ; 1259.84,1299.21 1338.58,1377.95 ; 2047.24,1535.43 2086.61,1574.8 ; 2047.24,1614.17 2086.61,1653.54 ; 2047.24,1692.91 2086.61,1732.28 ; 2125.98,1535.43 2165.35,1574.8 ; 2204.72,1535.43 2244.09,1574.8 ; 2283.46,1299.21 2401.57,1417.32 ; 2283.46,1377.95 2401.57,1496.06 ; 2283.46,1456.69 2401.57,1574.8 ; 2283.46,1535.43 2322.83,1574.8 ; 2362.2,1299.21 2401.57,1338.58 ; 3346.46,1614.17 3425.2,1535.43 ; 3346.46,1692.91 3543.31,1496.06 3582.68,1456.69 ; 3346.46,1771.65 3582.68,1535.43 ; 3503.94,1771.65 3582.68,1692.91 ; 3582.68,1614.17 3425.2,1771.65 ; 1102.36,1692.91 1102.36,1692.91 ; 1141.73,1574.8 1141.73,1574.8 ; 1299.21,1574.8 1299.21,1574.8 ; 2086.61,1574.8 2086.61,1574.8 ; 2165.35,1574.8 2165.35,1574.8 ; 2244.09,1574.8 2244.09,1574.8 ; 2401.57,1338.58 2401.57,1338.58 ; 2401.57,1496.06 2401.57,1496.06 ; 3425.2,1771.65 3425.2,1771.65
Bottom Solder:
  lines w40: 748.03,1574.8 944.88,1771.65 ; 748.03,1653.54 866.14,1771.65 ; 826.77,1574.8 1023.62,1771.65 ; 905.51,1574.8 1102.36,1771.65 ; 984.25,1574.8 1102.36,1692.91 ; 1062.99,1338.58 1102.36,1299.21 ; 1062.99,1496.06 1259.84,1299.21 ; 1062.99,1574.8 1102.36,1614.17 ; 1102.36,1535.43 1299.21,1338.58 ; 1181.1,1299.21 984.25,1496.06 ; 1220.47,1574.8 1338.58,1456.69 ; 1338.58,1377.95 1141.73,1574.8 ; 1338.58,1535.43 1299.21,1574.8 ; 2047.24,1614.17 2125.98,1692.91 ; 2047.24,1692.91 2125.98,1771.65 ; 2125.98,1535.43 2165.35,1574.8 ; 2125.98,1614.17 2047.24,1535.43 ; 2204.72,1535.43 2244.09,1574.8 ; 2283.46,1299.21 2401.57,1417.32 ; 2283.46,1377.95 2401.57,1496.06 ; 2283.46,1456.69 2401.57,1574.8 ; 2283.46,1535.43 2322.83,1574.8 ; 2362.2,1299.21 2401.57,1338.58 ; 3346.46,1614.17 3425.2,1535.43 ; 3346.46,1692.91 3582.68,1456.69 ; 3346.46,1771.65 3582.68,1535.43 ; 3503.94,1771.65 3582.68,1692.91 ; 3582.68,1299.21 3582.68,1377.95 ; 3582.68,1614.17 3425.2,1771.65 ; 984.25,1496.06 984.25,1496.06 ; 1102.36,1692.91 1102.36,1692.91 ; 1141.73,1574.8 1141.73,1574.8 ; 1299.21,1574.8 1299.21,1574.8 ; 2047.24,1535.43 2047.24,1535.43 ; 2125.98,1771.65 2125.98,1771.65 ; 2165.35,1574.8 2165.35,1574.8 ; 2244.09,1574.8 2244.09,1574.8 ; 2401.57,1338.58 2401.57,1338.58 ; 2401.57,1496.06 2401.57,1496.06 ; 3425.2,1771.65 3425.2,1771.65
Mechanical 1:
  circle w0.5: c3739.91,2362.21 r137.8
  circle w0.5: c3739.91,196.85 r137.8
  circle w0.5: c196.6,196.85 r137.8
  circle w0.5: c196.6,2362.21 r137.8
  lines w0.5: 15.07,467.46 13.67,466.07 3.39,455.78 0.25,452.65 0.25,451.58 0.25,422.75 0.25,196.85 ccw(c196.6,196.85) 196.6,0.5 3739.91,0.5 ccw(c3739.91,196.85) 3936.27,196.85 3936.27,2362.21 ccw(c3739.91,2362.21) 3739.91,2558.56 3326.06,2558.56 3313.09,2545.59 3313.07,2545.59 ; 15.07,1818.02 13.67,1816.62 3.39,1806.34 0.25,1803.2 0.25,756.04 13.22,743.07 ; 488.94,467.46 489.87,466.53 499.78,456.62 598.91,456.62 755.43,456.62 755.43,467.46 755.43,751.9 501.14,751.9 492.77,743.53 492.29,743.05 ; 488.94,1818.02 489.87,1817.09 499.78,1807.18 598.91,1807.18 755.43,1807.18 755.43,1818.02 755.43,2102.46 501.14,2102.46 492.77,2094.09 492.29,2093.61 ; 1142.65,2069.8 1141.72,2068.87 1131.81,2058.96 1131.81,1959.83 1131.81,1803.31 1142.65,1803.31 1427.09,1803.31 1427.09,2057.6 1418.72,2065.97 1418.24,2066.45 ; 1142.65,2543.67 1141.26,2545.07 1130.97,2555.35 1127.77,2558.56 215.44,2558.56 197.23,2558.56 196.67,2558.56 196.6,2558.56 ccw(c196.6,2362.21) 0.25,2362.21 0.25,2106.6 13.22,2093.62 ; 2126.93,2069.8 2126,2068.87 2116.09,2058.96 2116.09,1959.83 2116.09,1803.31 2126.93,1803.31 2411.37,1803.31 2411.37,2057.6 2403,2065.97 2402.52,2066.45 ; 2126.93,2543.67 2125.53,2545.07 2115.25,2555.35 2112.11,2558.49 1431.23,2558.49 1418.26,2545.52 ; 2402.52,2545.52 2402.54,2545.52 2415.51,2558.49 3022.73,2558.49 3025.8,2555.42 3036.08,2545.14 3037.48,2543.74 ; 3037.48,2069.87 3036.55,2068.94 3026.64,2059.03 3026.64,1959.9 3026.64,1803.38 3037.48,1803.38 3321.92,1803.38 3321.92,2057.67 3313.55,2066.04 3313.07,2066.52 ; 13.22,743.05 13.22,743.07 ; 13.22,2093.61 13.22,2093.62 ; 1418.24,2545.52 1418.26,2545.52 ; 189,885 189,1675 237,1675 237,885 189,885 ; 1476,885 1524,885 1524,1675 1476,1675 1476,885 ; 2762,885 2762,1675 2810,1675 2810,885 2762,885
  lines w0.51: 13.22,743.05 492.29,743.05 ; 13.22,2093.61 492.29,2093.61 ; 15.07,467.46 488.94,467.46 ; 15.07,1818.02 488.94,1818.02 ; 1142.65,2069.8 1142.65,2543.67 ; 1418.24,2066.45 1418.24,2545.52 ; 2126.93,2069.8 2126.93,2543.67 ; 2402.52,2066.45 2402.52,2545.52 ; 3037.48,2069.87 3037.48,2543.74 ; 3313.07,2066.52 3313.07,2545.59